# EAGLE board GlucometerV2.3 - Copy (EAGLE 7.2.0)
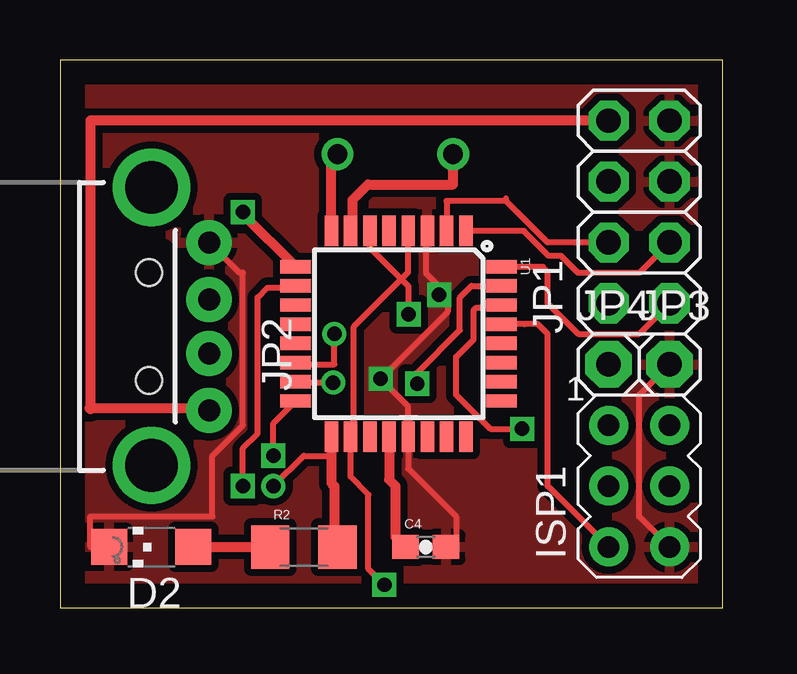
[diagram p0: board, top side]
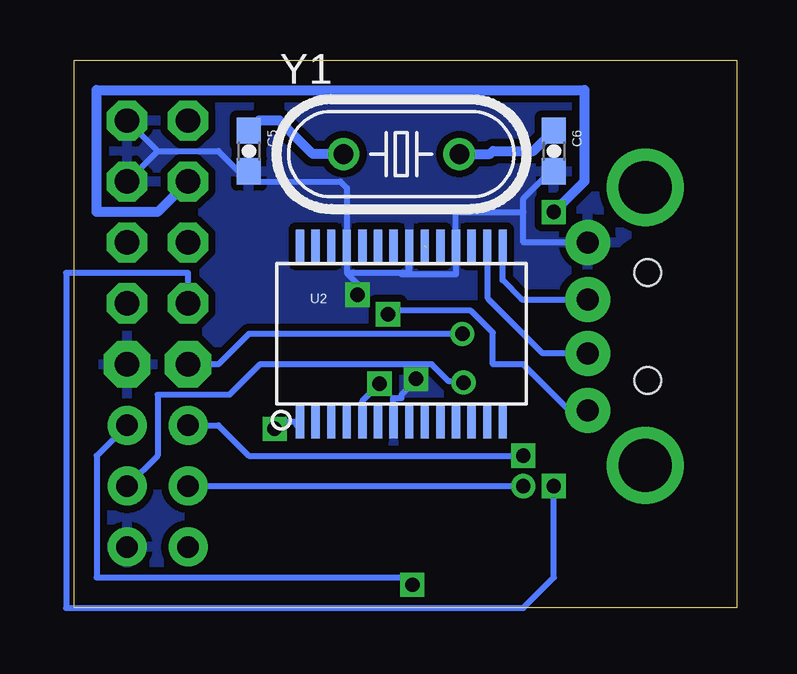
[diagram p1: board, bottom side, seen from below]

Size 27.61 x 22.85 mm. Coordinates in mm from the lower left corner, seen from the top.
Outline: 0,0 27.61,0 27.61,22.85 0,22.85 0,0
Copper layers (1*16): Top 0.035mm / dielectric 1.5mm / Bottom 0.035mm
Design rules "default": minimum track width 10mil, minimum drill 24mil, track to track 8mil, track to pad 8mil, pad to pad 8mil, via to via 8mil, smd to smd 8mil, copper to edge 40mil, drill to drill 8mil, minimum pad ring 10mil, minimum via ring 8mil, stop-mask expansion 4mil, vias tented up to drill 0mil, thermal gap 10mil

## Footprints (pad centres in the part's own frame; a part is rotated, then mirrored left to right if it is on the bottom)
0603-CAP = smd 1.1 x 1: 1 -0.85,0; 2 0.85,0
CHIPLED_1206 = smd 1.5 x 1.5: A 0,-1.75; C 0,1.75
AVRISP = drill 0.9 pad 1.626: 1 -1.27,2.54; 2 1.27,2.54; 3 -1.27,0; 4 1.27,0; 5 -1.27,-2.54; 6 1.27,-2.54
2X04 = drill 1.016 pad 1.676 octagon: 1 -3.81,-1.27; 2 -3.81,1.27; 3 -1.27,-1.27; 4 -1.27,1.27; 5 1.27,-1.27; 6 1.27,1.27; 7 3.81,-1.27; 8 3.81,1.27
USB-A-H = drill 0.914 pad 1.88: D+ 2.4,1.127; D- 2.4,-1.127; GND 2.4,3.5; VBUS 2.4,-3.5 | drill 2.2: GND2 0,-5.8; GND3 0,5.8 | hole 1.1: -0.1,2.25; -0.1,-2.25
1X01 = drill 1.016 pad 1.93 octagon: 1 0,0
1206 = smd 1.6 x 1.8: 1 -1.4,0; 2 1.4,0
TQFP32-08 = smd 1.27 x 0.559: 1 -4.293,2.8; 2 -4.293,2; 3 -4.293,1.2; 4 -4.293,0.4; 5 -4.293,-0.4; 6 -4.293,-1.2; 7 -4.293,-2; 8 -4.293,-2.8; 17 4.293,-2.8; 18 4.293,-2; 19 4.293,-1.2; 20 4.293,-0.4; 21 4.293,0.4; 22 4.293,1.2; 23 4.293,2; 24 4.293,2.8 | smd 0.559 x 1.27: 9 -2.8,-4.293; 10 -2,-4.293; 11 -1.2,-4.293; 12 -0.4,-4.293; 13 0.4,-4.293; 14 1.2,-4.293; 15 2,-4.293; 16 2.8,-4.293; 25 2.8,4.293; 26 2,4.293; 27 1.2,4.293; 28 0.4,4.293; 29 -0.4,4.293; 30 -1.2,4.293; 31 -2,4.293; 32 -2.8,4.293
SSOP28DB = smd 0.348 x 1.397: 1 -4.225,-3.656; 2 -3.575,-3.656; 3 -2.925,-3.656; 4 -2.275,-3.656; 5 -1.625,-3.656; 6 -0.975,-3.656; 7 -0.325,-3.656; 8 0.325,-3.656; 9 0.975,-3.656; 10 1.625,-3.656; 11 2.275,-3.656; 12 2.925,-3.656; 13 3.575,-3.656; 14 4.225,-3.656; 15 4.225,3.656; 16 3.575,3.656; 17 2.925,3.656; 18 2.275,3.656; 19 1.625,3.656; 20 0.975,3.656; 21 0.325,3.656; 22 -0.325,3.656; 23 -0.975,3.656; 24 -1.625,3.656; 25 -2.275,3.656; 26 -2.925,3.656; 27 -3.575,3.656; 28 -4.225,3.656
HC49U-V = drill 0.813: 1 -2.413,0; 2 2.413,0

## Placement (x,y rotation side)
C4  0.1uF  [0603-CAP]  15.24,2.54 0 top
C5  0.1uF  [0603-CAP]  20.32,19.05 270 bottom
C6  0.1uF  [0603-CAP]  7.62,19.05 270 bottom
D2  RED  [CHIPLED_1206]  3.81,2.54 90 top
ISP1  AVRISP-6  [AVRISP]  24.13,5.08 0 top
JP1  [2X04]  24.13,16.51 90 top
JP2  USB-A-H  [USB-A-H]  3.81,11.74 0 top
JP3  [1X01]  25.4,10.16 0 top
JP4  [1X01]  22.86,10.16 0 top
R2  [1206]  10.16,2.54 0 top
U1  ATMEGA328P_TQFP  [TQFP32-08]  14.11,11.43 270 top
U2  FT232RLSSOP  [SSOP28DB]  13.97,11.43 0 bottom
Y1  [HC49U-V]  13.97,18.92 0 bottom

## Library data of the parts
C4-C6 = SparkFun-Capacitors; PROD_ID: CAP-00810
D2 ISP1 JP1 JP3 JP4 = adafruit
JP2 = SparkFun-Connectors; PROD_ID: CONN-08367
R2 = SparkFun-Resistors
U1 = SparkFun-DigitalIC; PROD_ID: IC-09069
U2 = SparkFun-DigitalIC; PROD_ID: IC-00870
Y1 = SparkFun-FreqCtrl

## Nets
D+: JP2.D+ U2.15
D-: JP2.D- U2.16
GND: C4.2 C5.2 C6.2 D2.C ISP1.6 JP1.5 JP1.7 JP2.GND JP3.1 U1.3 U1.21 U2.7 U2.18 U2.21 U2.25
IND: ISP1.3 R2.2 U1.17
MISO: ISP1.1 U1.16
MOSI: ISP1.4 U1.15
N$1: C4.1 U1.20
N$2: D2.A R2.1
N$3: C5.1 U1.7 Y1.1
N$5: C6.1 U1.8 Y1.2
PWM: JP4.1 U1.14
RESET: ISP1.5 U1.29
RX: U1.30 U2.1
S0: JP1.1 U1.32
S1: JP1.3 U1.1
S2: JP1.4 U1.2
S3: JP1.2 U1.10
SENSOROUT: JP1.6 U1.9
TX: U1.31 U2.5
VCCIO: U2.4
VIN: ISP1.2 JP1.8 JP2.VBUS U1.4 U1.6 U1.18 U2.20

## Tracks (layer width: path | path; a pad name or v marks a point on that pad's centre or on a via)
D+
  Bottom 0.254: U2.15 9.75,15.08 9.75,13.66 8.96,12.87 JP2.D+
D-
  Bottom 0.254: JP2.D- 8.07,10.61 10.36,12.9 10.36,15.05 U2.16
GND  (via drill 0.6)
  Top 0.254: ISP1.6 24.13,3.81 24.13,8.89 JP3.1 | C4.2 16.51,2.96 16.51,3.81 14.51,5.81 U1.21 14.51,8.4 v13.36,9.55 16.15,12.34 16.15,12.7 v15.8,13.06 15.8,13.41 15.24,13.97 15.24,15.65 U1.3 | D2.C 1.27,2.54 1.27,3.81 6.35,3.81 6.35,6.35 7.62,7.62 7.62,13.97 7.48,13.97 JP2.GND
  Bottom 0.254: JP1.5 24.13,19.05 | 24.13,19.05 21.59,19.05 20.74,18.2 C5.2 19.9,17.78 16.51,17.78 16.25,17.52 U2.25 16.25,13.97 | 13.66,13.97 13.66,15.07 U2.21 13.64,13.97 13.66,13.97 | 13.66,13.97 13.97,13.97 | 13.97,13.97 16.25,13.97 | v13.36,9.55 13.36,9.5 13.97,8.89 13.97,8.74 14.33,8.74 14.33,7.77 U2.7 | 16.25,13.97 15.8,13.52 v15.8,13.06 | JP2.GND 8.89,15.24 8.89,16.51 | 8.89,16.51 8.89,17.07 7.76,18.2 C6.2 | 13.97,13.97 13.97,13.92 11.68,13.92 11.68,15.09 U2.18 11.7,16.51 8.89,16.51 | JP1.7 24.13,19.05
  pour Top (isolate 0.305): 0,21.59 0,22.86 27.94,22.86 27.94,0 0,0
  pour Bottom (isolate 0.305): 0,22.86 27.94,22.86 27.94,0 0,0
IND  (via drill 0.6)
  Top 0.254: v8.89,5.08 10.16,6.35 11.31,6.35
  Top 0.406: U1.17 11.31,6.35 11.31,5.2 11.43,5.08 11.43,2.67 R2.2
  Bottom 0.254: ISP1.3 v8.89,5.08
MISO  (via drill 0.6)
  Top 0.254: v8.89,6.35 8.89,7.7 U1.16
  Bottom 0.254: ISP1.1 21.59,7.62 20.32,6.35 v8.89,6.35
MOSI  (via drill 0.6)
  Top 0.254: U1.15 9.85,9.4 v11.38,9.4
  Bottom 0.254: v11.38,9.4 11.43,9.45 11.99,9.45 12.7,10.16 19.86,10.16 21.13,8.89 24.13,8.89 24.13,6.35 ISP1.4
N$1
  Top 0.406: U1.20 13.71,5.34 13.97,5.08 13.97,2.96 C4.1
N$2
  Top 0.406: D2.A R2.1
N$3
  Top 0.406: U1.7 12.19,15.8 12.19,17.02 12.83,17.65 16.38,17.65 Y1.1
  Bottom 0.406: Y1.1 17.65,18.92 19.05,20.32 19.9,20.32 C5.1
N$5
  Top 0.406: U1.8 11.31,18.92 Y1.2
  Bottom 0.406: Y1.2 10.29,18.92 10.16,19.05 8.47,19.05 C6.1
PWM  (via drill 0.6)
  Top 0.254: U1.14 9.89,10.16 11.43,10.16 v11.43,11.43
  Bottom 0.254: v11.43,11.43 20.32,11.43 21.59,10.16 JP4.1
RESET
  Top 0.254: U1.29 19.35,11.83 19.36,11.84 19.91,11.84 20.32,11.43 20.32,5.08 ISP1.5
RX  (via drill 0.6)
  Top 0.254: U1.30 18.33,12.7 17.78,12.7 17.58,12.5 17.32,12.5 17.22,12.39 17.22,11.18 16.51,10.46 16.51,8.89 17.93,7.47 v19.25,7.47
  Bottom 0.254: 18.35,7.62 U2.1 18.95,7.77 v19.25,7.47
S0
  Top 0.254: JP1.1 24.13,11.43 21.59,11.43 20.32,12.7 20.32,14.02 20.12,14.22 U1.32
S1
  Top 0.254: JP1.3 24.13,13.97 21.59,13.97 20.88,14.68 20.37,14.68 19.33,15.72 U1.1
S2
  Top 0.254: JP1.4 20.32,15.24 18.59,16.97 18.59,17.07 18.49,16.97 16.1,16.97 16.11,16.96 U1.2
S3  (via drill 0.6)
  Top 0.254: 9.85,13.46 U1.10 9.75,13.36 8.64,13.36 8.23,12.95 8.23,7.26 7.62,6.66 v7.62,5.08
  Bottom 0.254: JP1.2 22.86,13.97 27.94,13.97 27.94,0 8.89,0 7.62,1.27 v7.62,5.08
SENSOROUT  (via drill 0.6)
  Top 0.406: v7.62,16.51 7.62,16.43 U1.9
  Bottom 0.406: JP1.6 24.13,16.51 26.67,16.51 26.67,21.59 6.35,21.59 6.35,17.78 v7.62,16.51
TX  (via drill 0.6)
  Top 0.254: v14.88,9.35 14.88,9.8 16.66,11.58 16.66,12.95 17.14,13.43 U1.31
  Bottom 0.254: U2.5 15.6,8.64 v14.88,9.35
VIN  (via drill 0.6)  (1 unrouted)
  Top 0.254: 14.22,13.72 12.24,11.73 12.24,7.27 U1.18 12.11,5.47 12.85,4.72 12.85,1.63 v13.51,0.97 | 14.22,13.72 14.51,14 U1.4 | v14.53,12.24 14.53,13.41 14.22,13.72 | U1.6 12.91,15.03 14.22,13.72
  Top 0.406: JP2.VBUS 6.12,8.33 1.22,8.33 1.27,8.28 1.27,20.32 JP1.8
  Bottom 0.254: JP2.VBUS 6.97,8.24 8.89,10.16 10.16,10.16 10.16,11.48 11.07,12.39 14.38,12.39 v14.53,12.24 | ISP1.2 26.67,6.35 26.67,1.27 13.82,1.27 v13.51,0.97